# Altium PCB training.PcbDoc
Units mil, origin at the board's own origin, x right, y up, seen from the top; angles counter-clockwise.
Board outline 1820 x 1080 mil, 2 copper layers (Top Layer, Bottom Layer); 8 components, 4 nets, 20 pads, 1 vias.
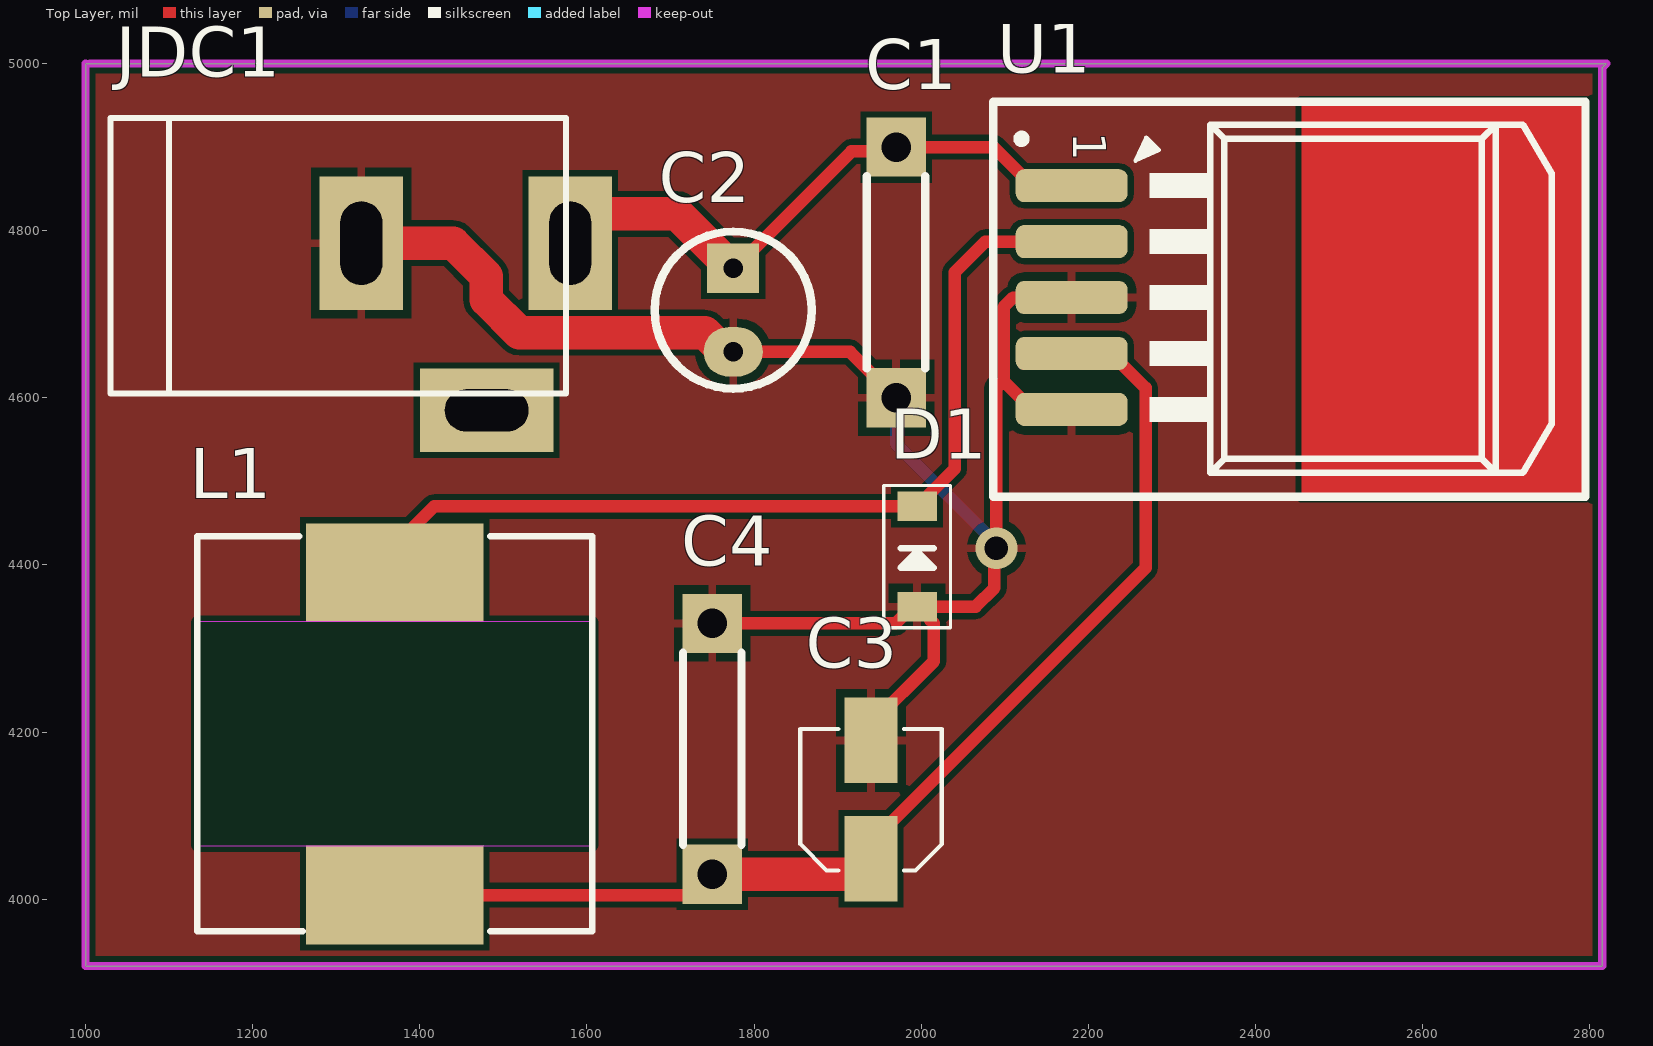
[diagram p0: Top Layer view]
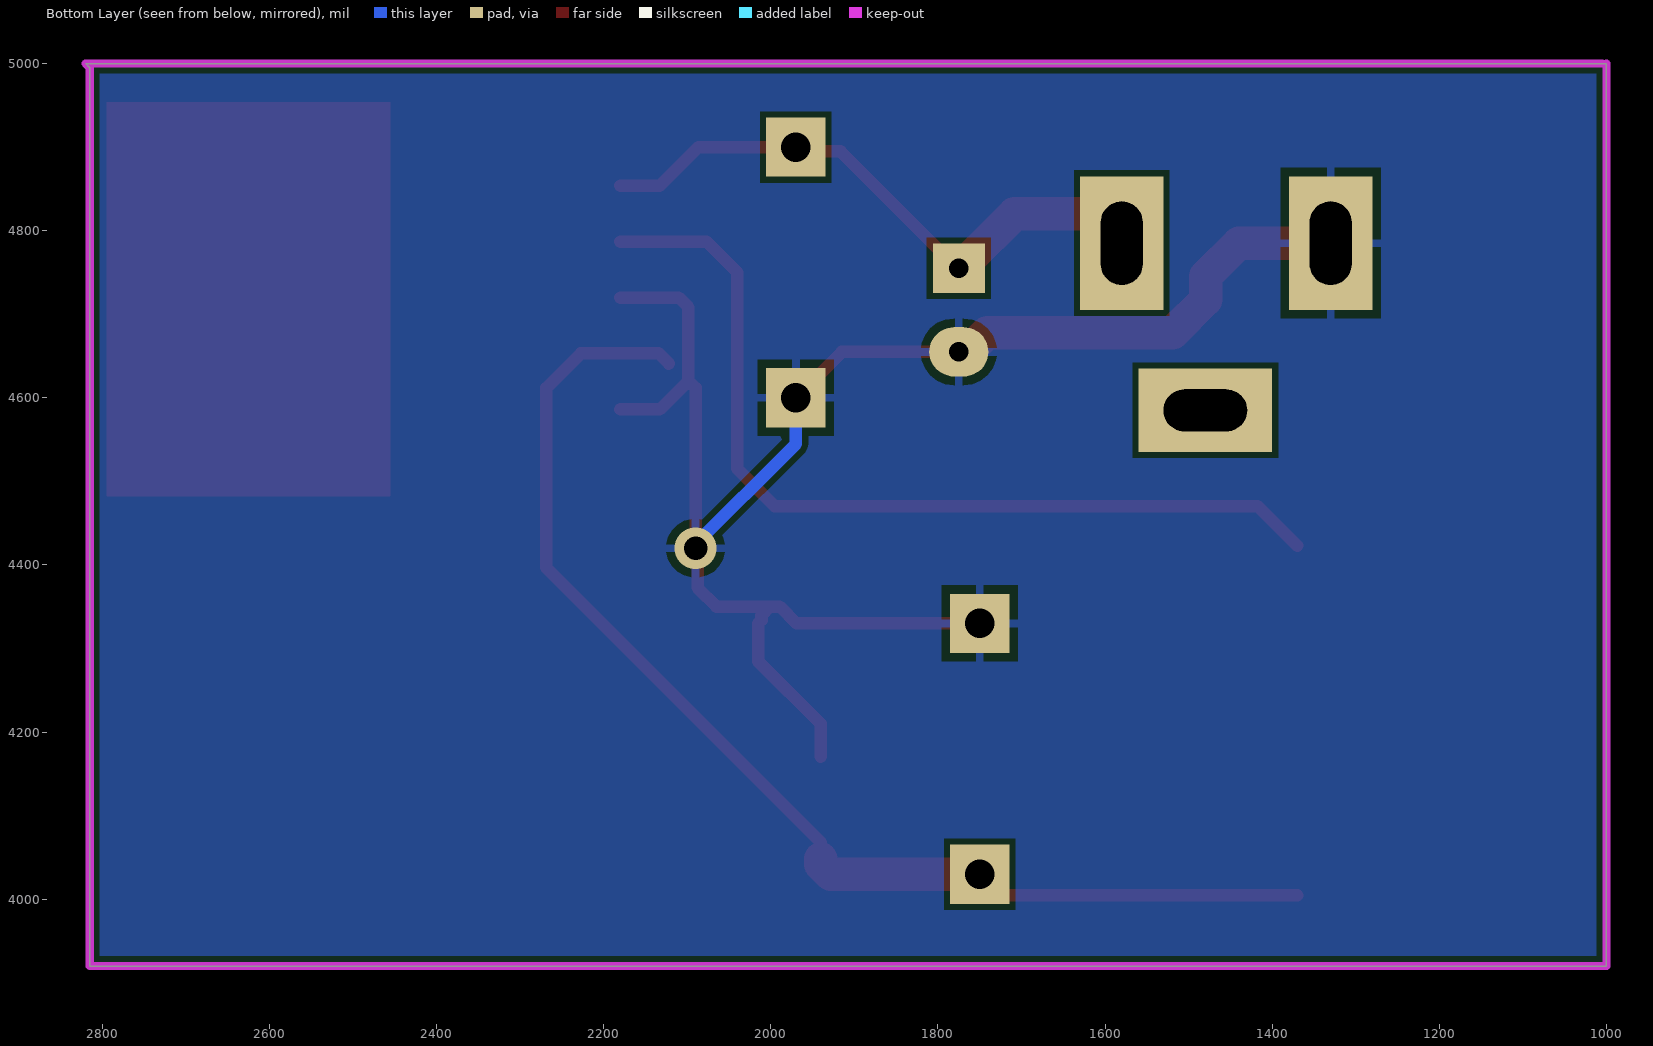
[diagram p1: Bottom Layer view, seen from below]
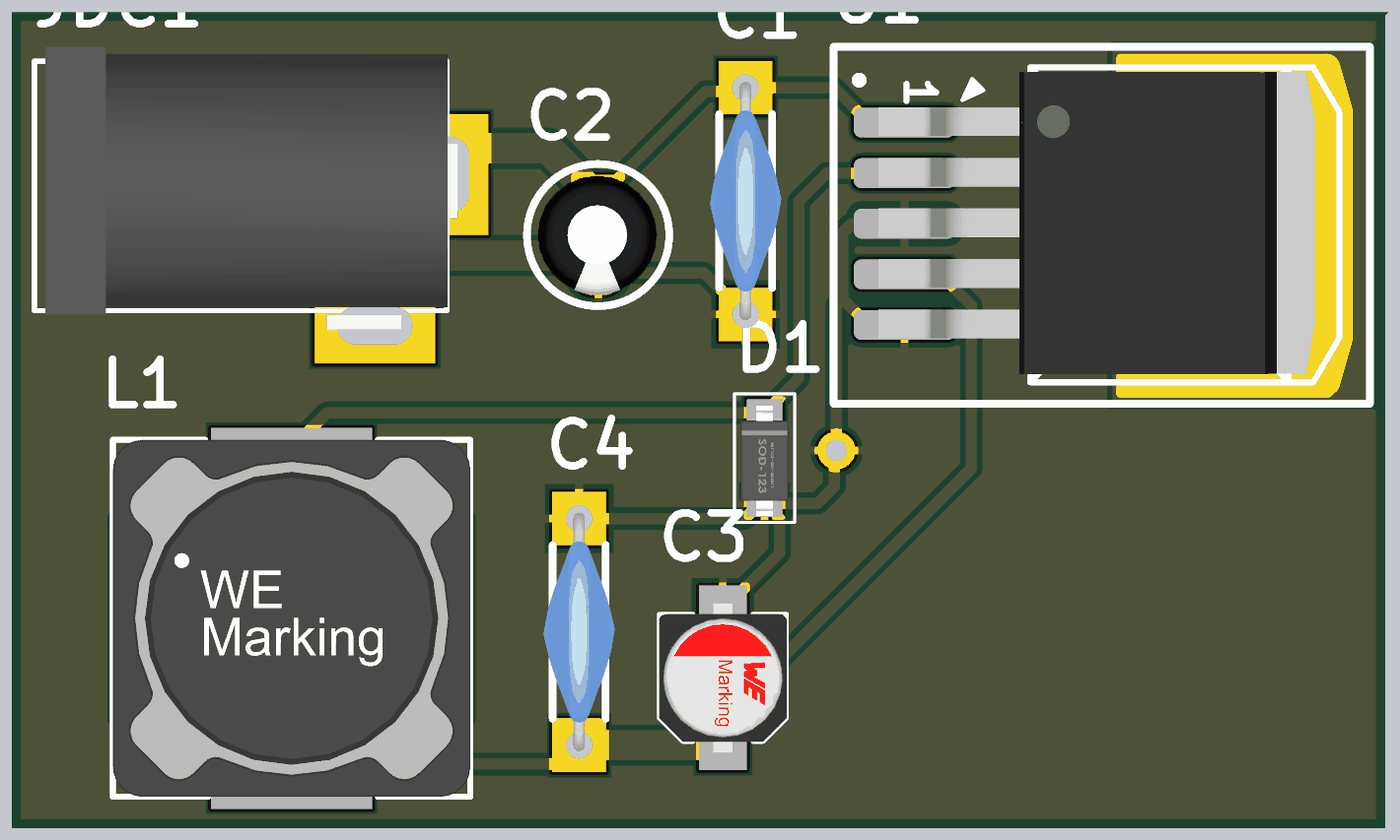
[diagram p2: 3D render of the assembled board from above, using the file's embedded part models]

## Layer stack, top to bottom
Top Solder: solder mask 0.4, Solder Resist, Dk 3.5
Top Layer: signal copper 1.4
Dielectric 1: dielectric 12.6, FR-4, Dk 4.8
Bottom Layer: signal copper 1.4
Bottom Solder: solder mask 0.4, Solder Resist, Dk 3.5

## Board outline
1000,3920 1000,5000 2820,5000 2815,4995 2815,3920

## Design rules (kind name [scope] priority, off if disabled: settings)
Clearance [All] p1: gap=7 ignorepadtopadclearanceinfootprint=TRUE
PolygonConnect [All] p1: connectstyle=Relief reliefconductorwidth=10 reliefentries=4 polygonreliefangle="90 Angle" airgapwidth=10
RoutingVias [All] p1: holewidth=14 width=30 viastyle="Through Hole" minholewidth=28 minwidth=50 maxholewidth=28 maxwidth=50
SolderMaskExpansion [All] p1: expansion=4 istentingtop=FALSE
Width [All] p1: maxlimit=40 minlimit=7 preferedwidth=15
30 further rules are at their usual default settings.

## Components (designator, comment, footprint, x,y, rotation, side; value= is the part's Value field where it differs from the comment)
C1 "600uF - 18V" 103/2KV 1970,4600 r90 top
C2 "470uF" CA-ALU-2.54 1775,4705 r270 top value=104
C3 "470uF" CAP-ALU-SMD-4.5x5x1.4 1940,4119.13 r90 top
C4 "330uF - 10V" 103/2KV 1750,4330 r270 top
D1 "1N5822" DIO-SMD-123 1995,4410 r270 top value="Diode c?m 1N5408"
JDC1 "Jac DC" DC-IN 1455,4685 r0 top
L1 "33uH" L-SMD-M-12x10 1370,4197.91 r0 top value="150 mH"
U1 "LM2976" TO263 2415,4735 r270 top

## Footprints (in the part's own frame and the unit in brackets; to place one, negate y for a bottom-side part, rotate by r counter-clockwise, add the part's x,y. Pads: shape width x height; smd on the part's side, far side on the other; paste and mask are expansions set on the pad)
103/2KV [mm]
  rect 1.8x1.8 hole 0.9: 1(0,0) 2(7.62,0)
  silkscreen extent 0.89,-0.89 6.73,0.89, body extent -0.19,-1.2 7.81,1.19, height 9.03
CA-ALU-2.54 [mm]
  rect 1.5x1.58 hole 0.6: 1(-1.27,0)
  oval 1.5x1.8 hole 0.6: 2(1.27,0)
  silkscreen extent -2.39,-2.39 2.39,2.39, body extent -2,-2.03 1.99,1.97, height 7.01
CAP-ALU-SMD-4.5x5x1.4 [mm]
  rect 2.6x1.6 smd: 1(-1.8,0) 2(1.8,0)
  silkscreen extent -2.15,-2.15 2.15,2.15, body extent -2.5,-2.15 2.5,2.15, height 5.45
DC-IN [mil] "Jac DC input"
  rect 100x160 hole 50 slot 100 at 90 deg: 1(125,100) 2(-125,100)
  rect 160x100 hole 50 slot 100 at 0 deg: 3(25,-100)
  silkscreen extent -425,-80 120,250, body extent -410,-105 134,269, height 434
DIO-SMD-123 [mm]
  rect 0.9x1.2 smd: 1(1.524,0) 2(-1.524,0)
  silkscreen extent -2.16,-1.02 2.16,1.02, body extent -1.76,-0.8 1.94,0.8, height 1.25
L-SMD-M-12x10 [mm] "WE-PDA SMD Shielded Power Inductor, 1210"
  rect 5.4x3 smd: 1(0,4.9) 2(0,-4.9)
  Top Layer keep-out region: -6,-3.4 6,-3.4 6,3.4 -6,3.4
  silkscreen extent -6,-6 6,6, body extent -6,-6 6,6, height 9.7
TO263 [mm]
  rrect50% 1x3.4 smd: 1(-3.019,-5.969) 2(-1.319,-5.969) 4(2.081,-5.969) 5(3.781,-5.969)
  rrect50% 1x3.4 smd mask+0: 3(0.381,-5.969)
  Top Layer region: -5.568,1.016 6.432,1.016 6.432,9.65 -5.568,9.65
  silkscreen extent -5.57,-8.35 6.43,9.65, body extent -4.73,-6.84 5.43,7.8, height 4.57

## Part data
C1 C4: library part Cap2KV, "Capacitor Ceramic 2KV", LatestRevisionDate=17-Jul-2002, LatestRevisionNote="Re-released for DXP Platform.", PackageReference=RAD-0.3, Published=8-Jun-2000, Publisher="Altium Limited"
C2: library part CAP-ALU-DIP, "Capacitor (Semiconductor SIM Model)", LatestRevisionDate=17-Jul-2002, LatestRevisionNote="Re-released for DXP Platform.", PackageReference=C1206, Publisher="Altium Limited"
C3: library part CAP-ALU-SMD, "Polarized Capacitor (Axial)", LatestRevisionDate=17-Jul-2002, LatestRevisionNote="Re-released for DXP Platform.", PackageReference=POLAR0.8, Published=8-Jun-2000, Publisher="Altium Limited"
D1: "Schottky Rectifiers"
JDC1: library part DCIN, "Jac DC input"
L1: library part Inductor, "Inductor"
U1: library part LM2596, Max Input Voltage="12 V", Max Output Current="3 (6.0 peak) A", Max Output Voltage=mV, Temperature Range="-40 to +125 degC", Category=IC-Power, Min Input Voltage=mV, Min Output Voltage=mV, Mounting Technology="Surface Mount", Status=Unreleased, Supply Voltage=mV

## Via types
v1: diameter 50, hole 28, Top Layer to Bottom Layer, 1 vias

## Nets (pads, with @x,y where several pads share a name; then routed paths per layer and width w, separated by ;. In a path a pad name is that pad's centre, name@x,y a point inside that pad or via, vN(x,y) a via of type N, cw(c..) or ccw(c..) an arc to the next point about the centre after c; other vN are vias at no path point)
3.3V: C3.1 C4.2 L1.2 U1.4 | length 1460
  Top Layer w15: L1.2 1725,4005 C4.2 ; C3.1 1940,4067.95 2268.44,4396.39 2268.44,4611.88 2227.24,4653.07 U1.4 2134.02,4653.07 U1.4@2122.02,4641.06
  Top Layer w40: C4.2 1928.5,4030 1940,4041.5 C3.1
+12: C1.2 C2.1 JDC1.1 U1.1 | length 723.5
  Top Layer w15: C2.1 1776.57,4755 1916.57,4895 1965,4895 C1.2 2086.61,4900 2132.76,4853.86 U1.1
  Top Layer w40: JDC1.1 1580,4790 1610,4820 1708.43,4820 1763.9,4764.53 1765.47,4764.53 C2.1
GND: C1.1 C2.2 C3.2 C4.1 D1.1 JDC1.2 U1.3 U1.5 | length 2064
  Top Layer w15: C4.1 1969.09,4330 1989.09,4350 D1.1 D1.1@2000.91,4350 ; C2.2 1915,4655 C1.1 ; C3.2@1940,4170.31 C3.2 1940,4209.69 2015,4284.69 2015,4330 2011.12,4333.88 2011.12,4339.78 D1.1@2000.91,4350 ; U1.5 2132.76,4586.14 2098.57,4620.33 ; U1.3 2110,4720 2098.57,4708.57 2098.57,4620.33 ; D1.1@2000.91,4350 2065,4350 2087.5,4372.5 2087.5,4417.5 v1(2090,4420) 2090,4611.76 2098.57,4620.33
  Top Layer w40: JDC1.2 1440,4785 1479.41,4745.59 1479.41,4717.41 1518.82,4678 1740.94,4678 1763.94,4655 C2.2
  Bottom Layer w15: C1.1 1970,4545 2095,4420 v1(2090,4420)
NetD1_2: D1.2 L1.1 U1.2 | length 1098.4
  Top Layer w15: L1.1@1370,4422.91 1417.09,4470 D1.2 2040,4515 2040,4750 2076.93,4786.93 U1.2
pads on no net: JDC1.3

## Polygon pours and split planes (outlines as drawn)
GND on Top Layer "NONET_L02_P-001" (solid, remove dead copper, pour order 0): 1005,4995 2810,4995 2810,3925 1005,3925
GND on Bottom Layer "NONET_L02_P-001" (solid, remove dead copper, pour order 3): 2810,4995 1005,4995 1005,3925 2810,3925

## Keep-outs
Keep-Out Layer:
  lines w10: 1000,5000 1000,3920 2815,3920 2815,4995 2820,5000 1005,5000

## Text inside footprints (layer, text, board x,y; h text height)
U1: Top Overlay "1" at 2182,4917.86 h39.37 r270